# Altium PCB 917S001(ZHTH-010)-F.PcbDoc (part 1 of 2)
Units mm, origin at the board's own origin, x right, y up, seen from the top; angles counter-clockwise.
Board outline 77.5 x 39.1 mm, 2 copper layers (Top Layer, Bottom Layer), stack 0.325 mm thick; 174 components, 101 nets, 467 pads, 299 vias.
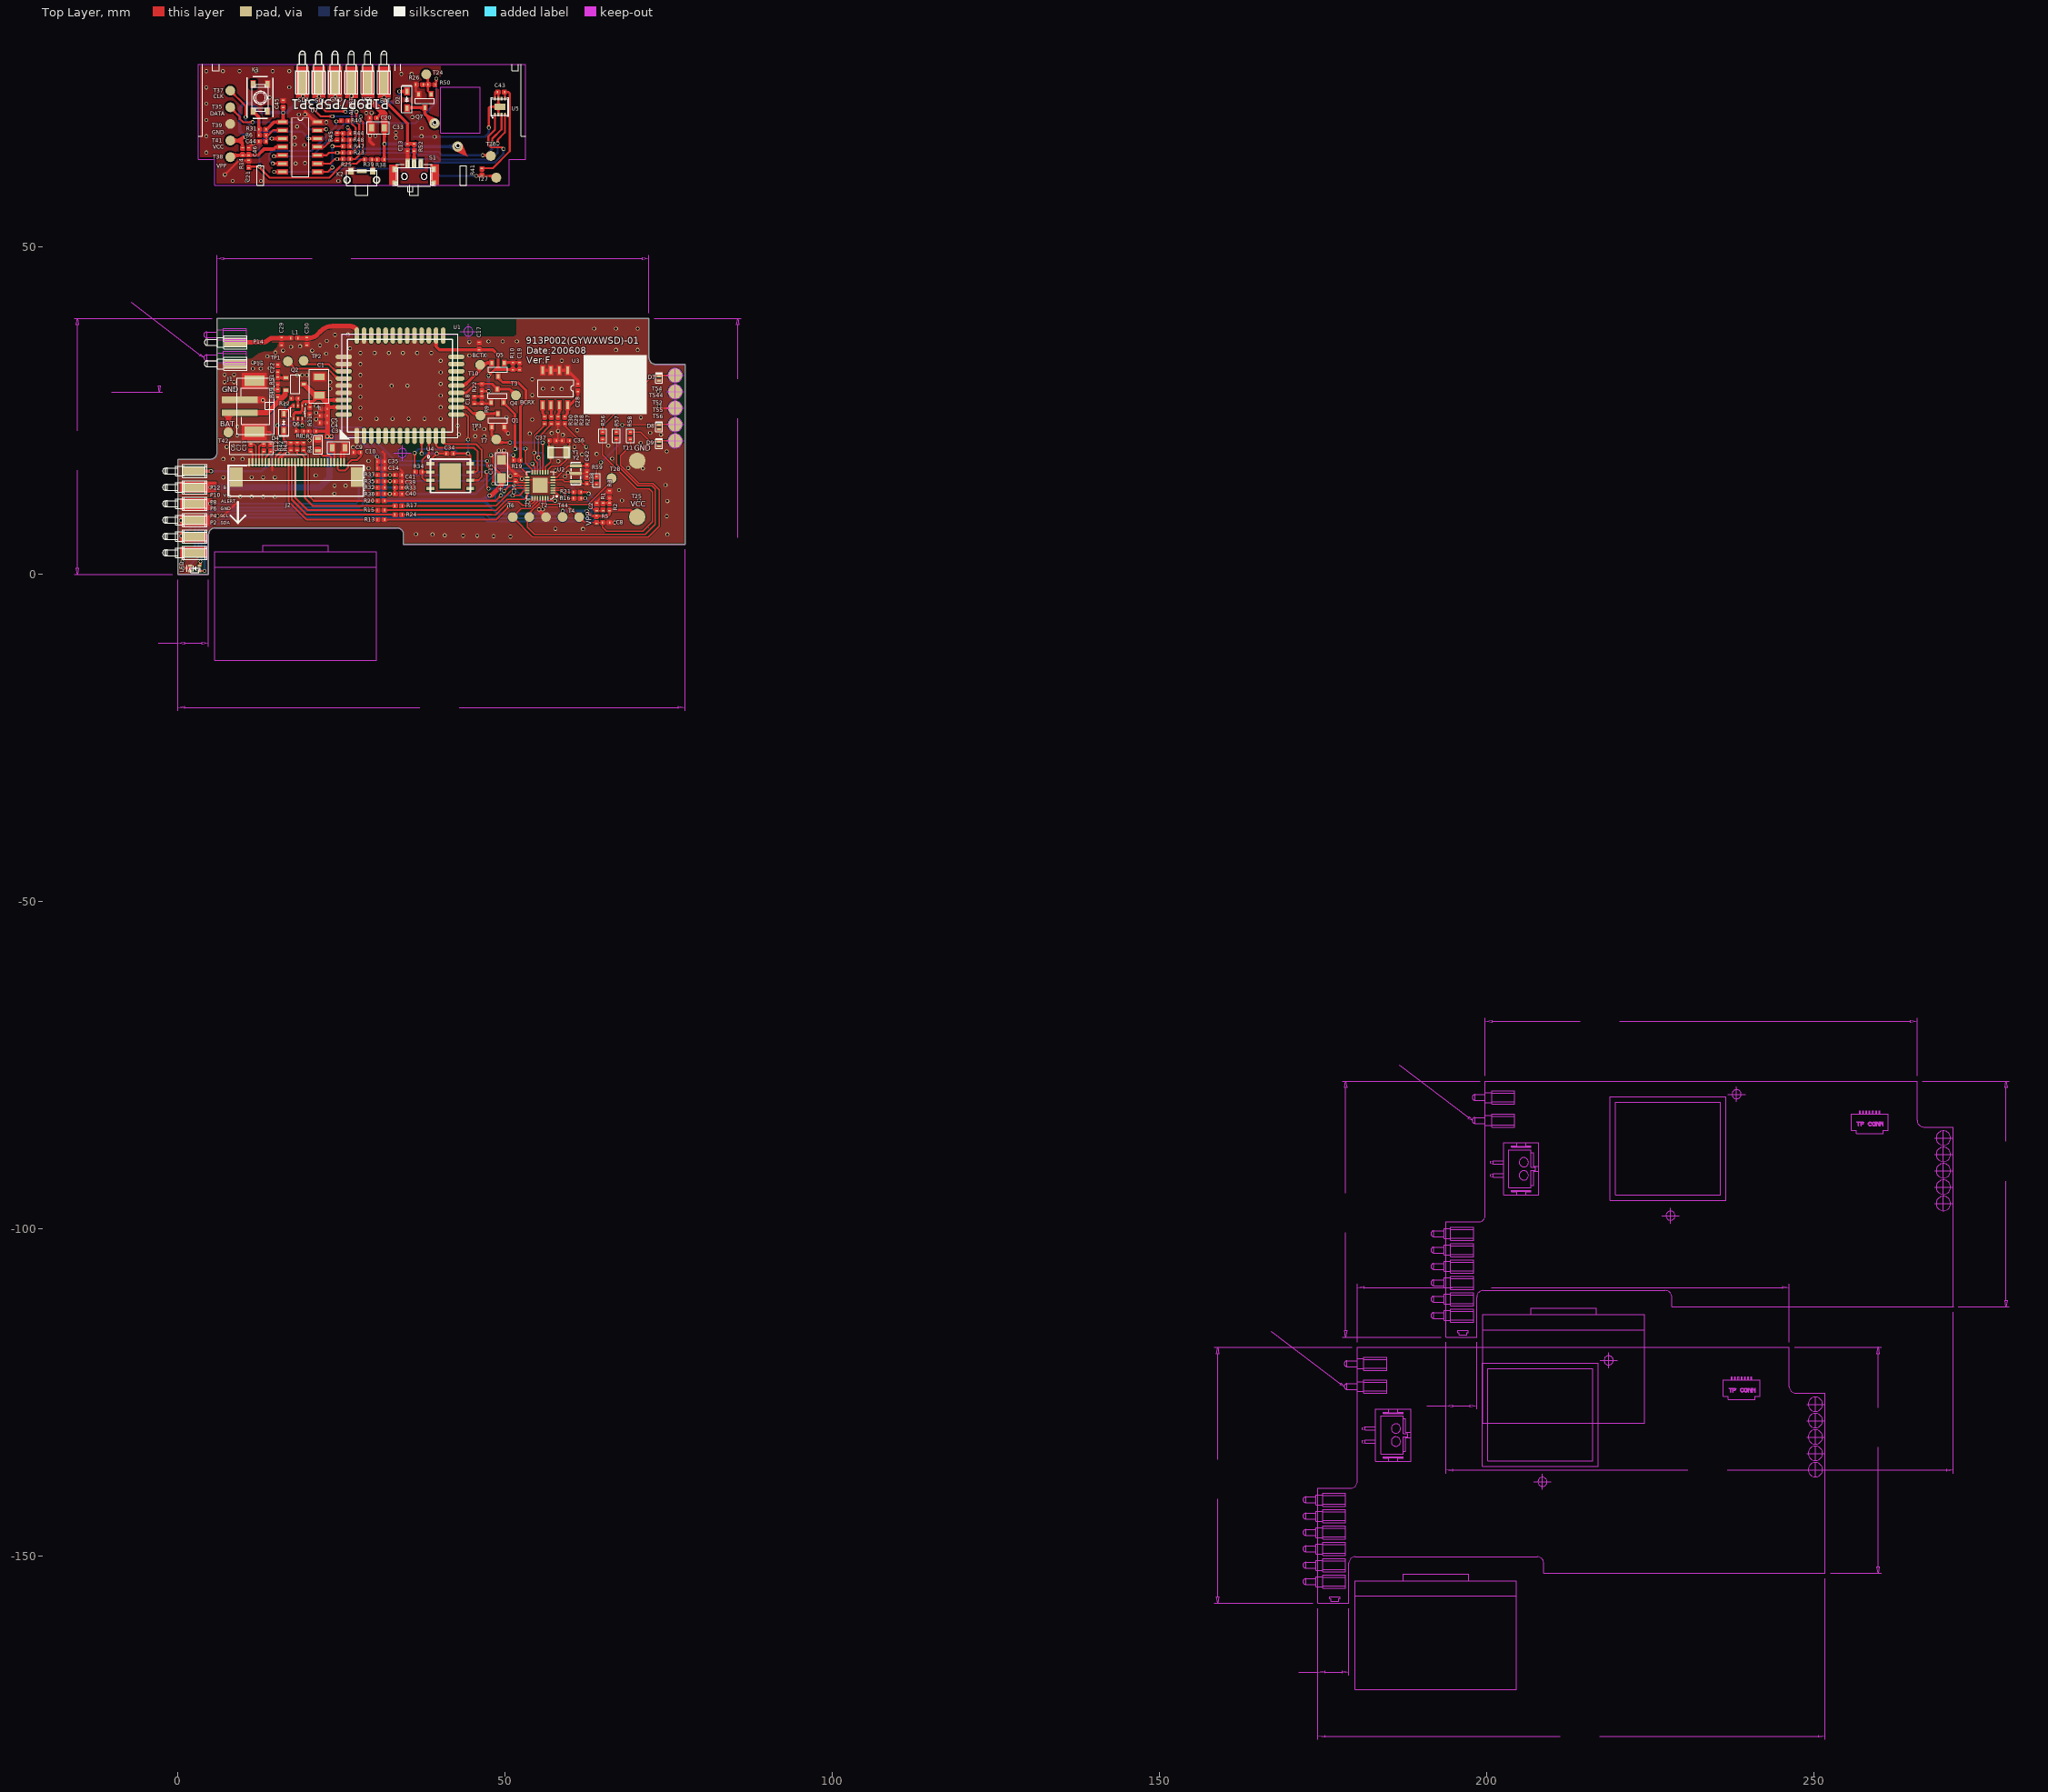
[diagram p0: Top Layer view]
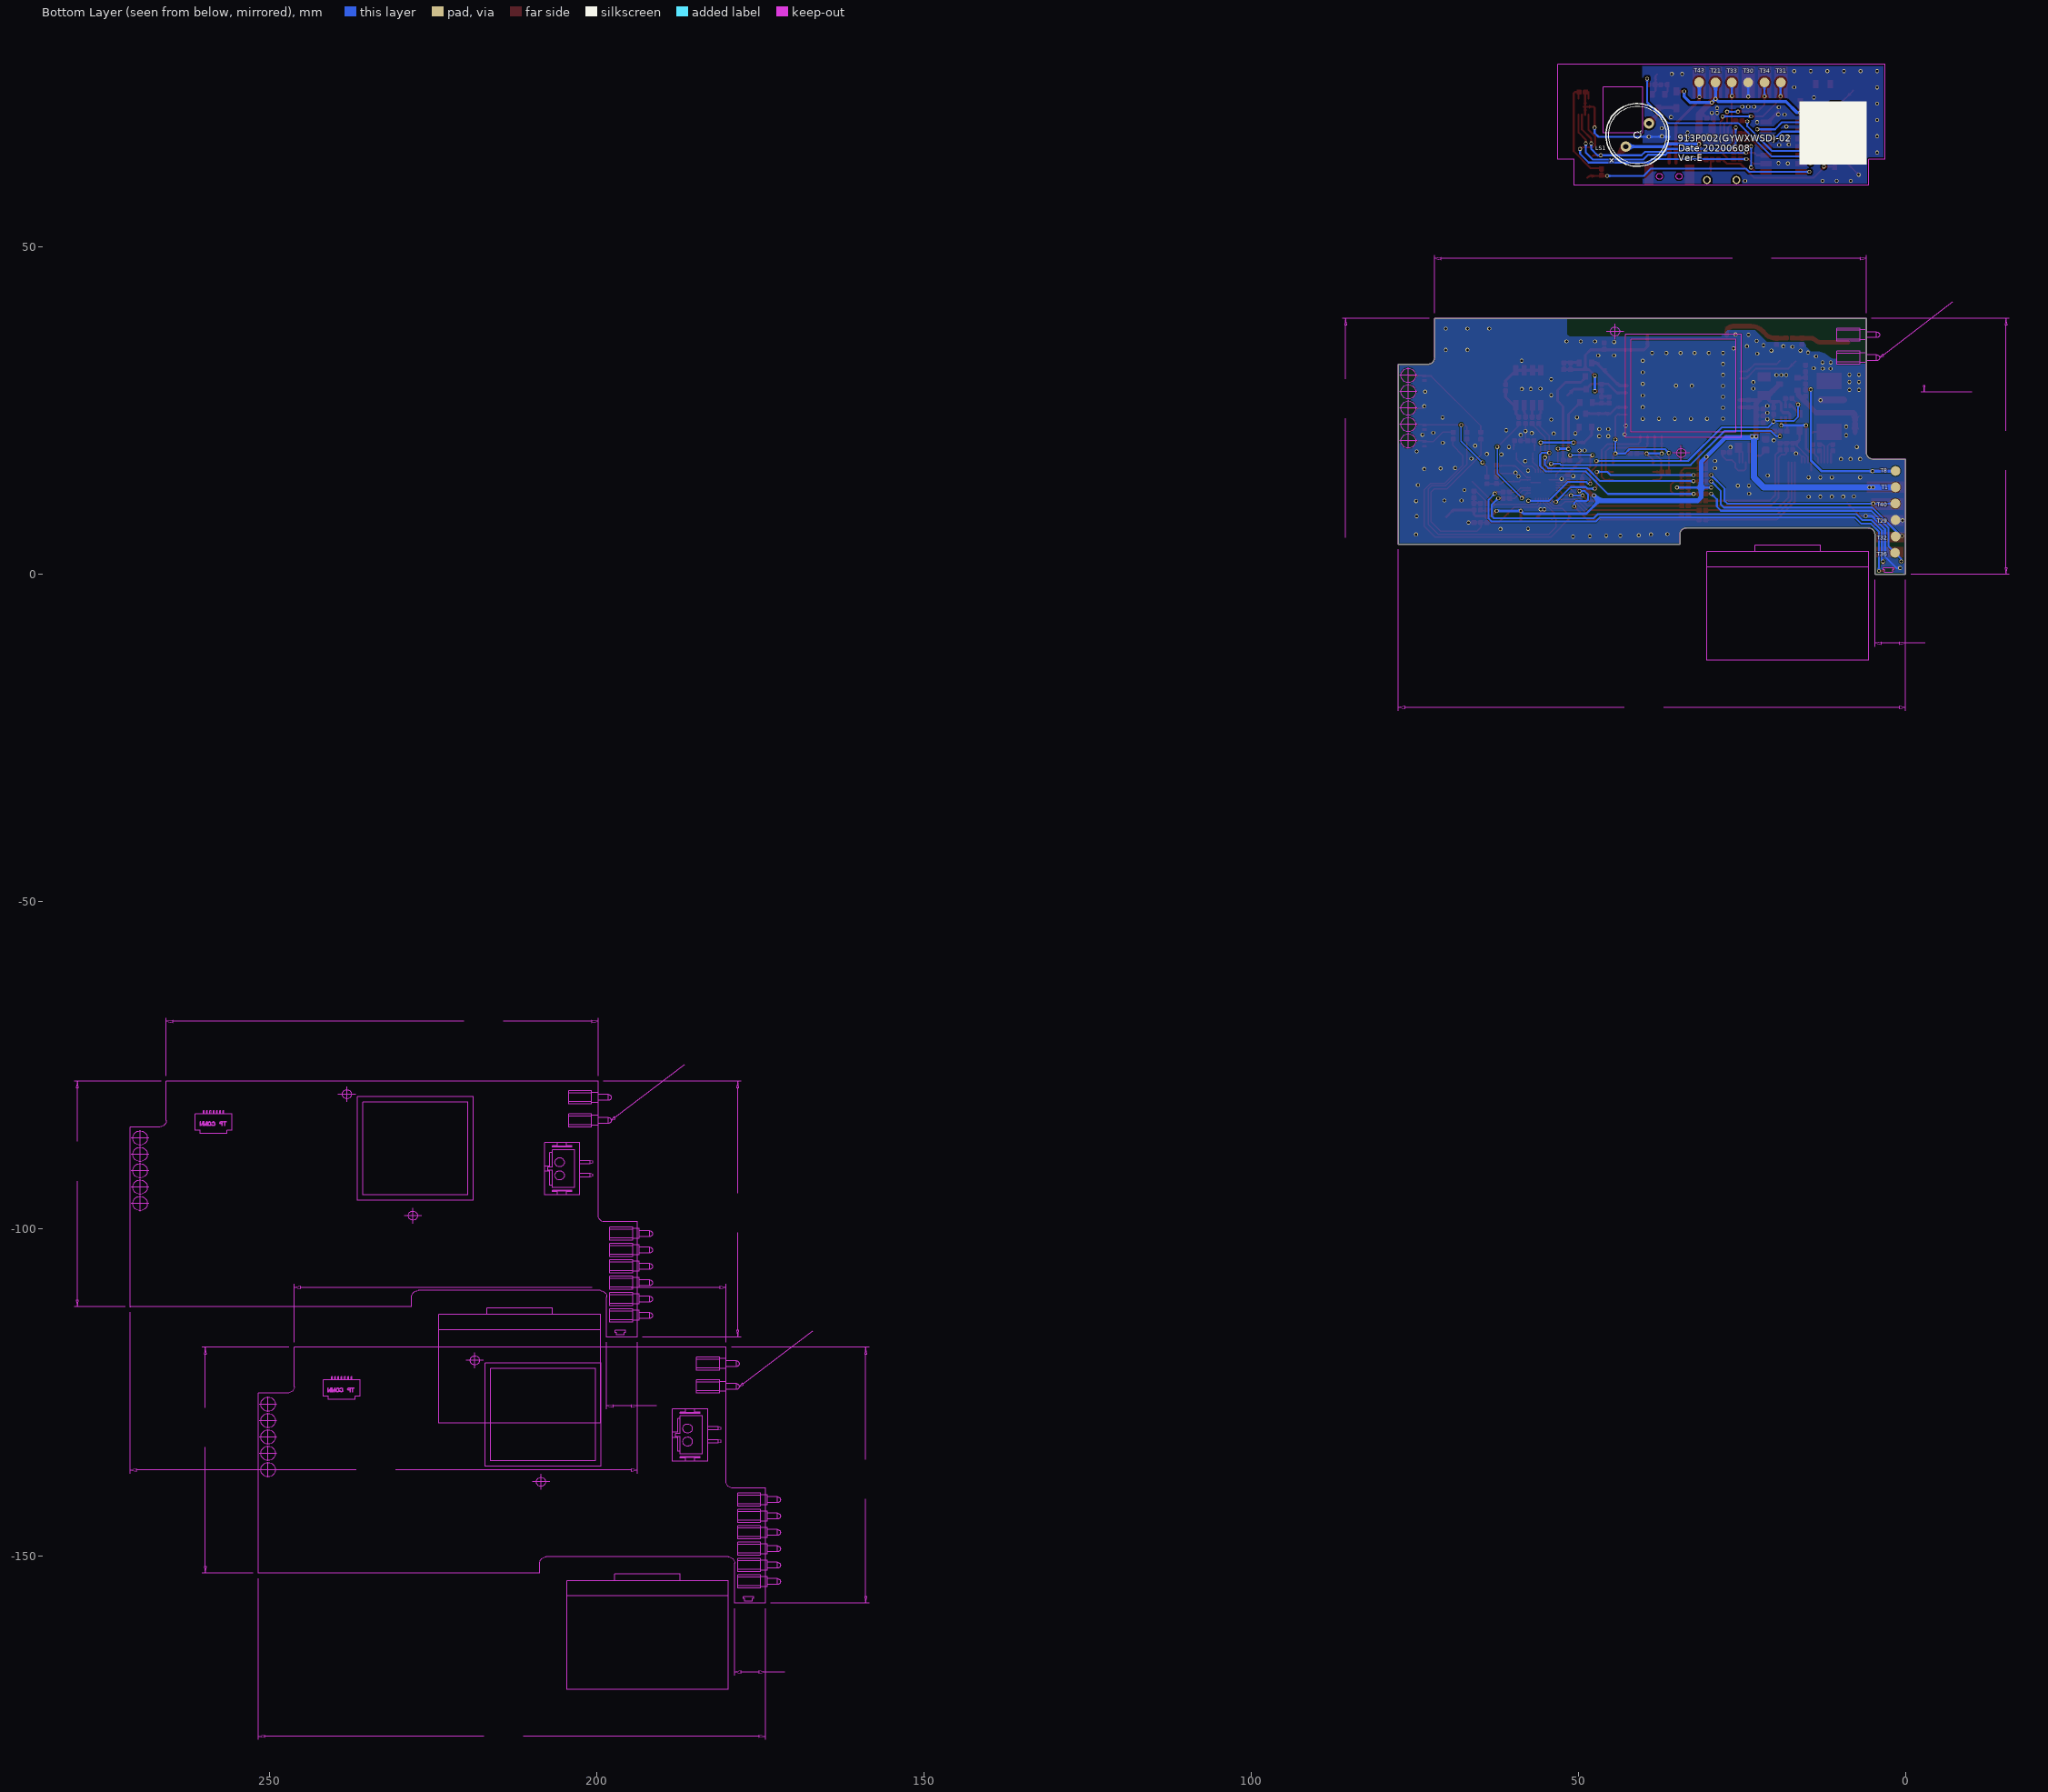
[diagram p1: Bottom Layer view, seen from below]

## Layer stack, top to bottom
Top Solder: solder mask 0.0102, Solder Resist, Dk 3.5
Top Layer: signal copper 0.0356
Dielectric 1: core 0.254, FR-4, Dk 4.2
Bottom Layer: signal copper 0.0356
Bottom Solder: solder mask 0.0102, Solder Resist, Dk 3.5

## Board outline
0,0 4.7,0 4.7,6.1 cw(c5.7,6.1) 5.7,7.1 33.5,7.1 cw(c33.5,6.1) 34.5,6.1 34.5,4.6 77.5,4.6 77.5,32.1 73,32.1 cw(c73,33.1) 72,33.1 72,39.1 6,39.1 6,18.6 cw(c5,18.6) 5,17.6 0,17.6

## Design rules (kind name [scope] priority, off if disabled: settings)
Clearance 0.3 [All] p1 off: gap=0.3
Clearance RF [(InNet('NetC29_2') AND InNet('BC_RF_ANT'))] p2: gap=0.17
Clearance 0.19 [All] p3: gap=0.15
PlaneConnect [All] p1: planeconnectstyle=Direct reliefexpansion=0.508 reliefentries=4 reliefconductorwidth=0.254 reliefairgap=0.254
PolygonConnect [All] p1: connectstyle=Direct reliefconductorwidth=0.254 reliefentries=4 polygonreliefangle="90 Angle" airgapwidth=0.254
RoutingVias [All] p1: holewidth=0.711 width=1.27 viastyle="Through Hole" minholewidth=0.711 minwidth=1.27 maxholewidth=0.711 maxwidth=1.27
SolderMaskExpansion [All] p1: expansion=0.102
Width [All] p1: maxlimit=1.5 minlimit=0.15 preferedwidth=0.3
29 further rules are at their usual default settings.

## Components (designator, comment, footprint, x,y, rotation, side; value= is the part's Value field where it differs from the comment)
C1 "100uF/6.3V" 3528 21.615,27.356 r90 top
C2 "0.1uF,0402" 0402#1 64.008,9.754 r0 top
C3 "0.1uF,0402" 0402#1 22.84,23.165 r90 top
C4 "100pF,0402" 0402#1 22.84,24.232 r90 top
C5 "22pF,0402" 0402#1 22.84,25.273 r90 top
C6 "1uF" 0402#1 11.151,18.771 r0 top
C7 "1uF" 0402#1 13.132,19.921 r180 top
C8 "0.1uF,0402" 0402#1 64.872,7.925 r270 top
C9 "4.7uF/25V" 0805 23.597,19.329 r270 top
C10 "2.2uF" 0402#1 27.965,18.644 r90 top
C11 "2.2uF,0402" 0402#1 14.199,19.921 r180 top
C12 "2.2uF,0402" 0402#1 17.272,18.974 r0 top
C13 "1uF,0402" 0402#1 35.102,64.649 r0 top
C14 "1uF,0402" 0402#1 31.623,16.205 r90 top
C15 "22uF/6.3V,3216" 3216 49.479,14.707 r270 top
C16 "0.1uF,0402" 0402#1 51.613,14.173 r0 top
C17 "2.2uF,0402" 0402#1 46.05,35.458 r180 top
C18 "1nF,±10%,50V" 0402#1 45.314,26.06 r0 top
C19 "1nF,±10%,50V" 0402#1 52.222,32.385 r180 top
C20 "0.1uF，0402" 0402#1 30.455,69.723 r90 top
C21 "100pF,0402" 0402#1 10.846,63.246 r180 top
C22 "0.1uF,0402" 0402#1 15.291,30.879 r0 top
C28 "0.1uF,0402" 0402#1 61.138,27.94 r0 top
C29 "NC" 0402#1 15.85,35.027 r0 top
C30 "NC" 0402#1 19.736,35.027 r0 top
C33 "10uF,±10%,10V" 0805 31.572,68.224 r90 top
C34 "0.1uF,0402" 0402#1 42.139,18.466 r90 top
C35 "0.1uF,0402" 0402#1 30.48,17.221 r270 top
C36 "10pF,0402" 0402#1 58.718,20.422 r270 top
C37 "10pF,0402" 0402#1 57.854,20.422 r90 top
C38 "NC" 0402#1 62.535,13.792 r0 top
C39 "33pF" 0402#1 34.29,14.199 r90 top
C40 "33pF" 0402#1 34.29,12.294 r90 top
C41 "33pF" 0402#1 34.29,15.189 r90 top
C42 "NC" 0402#1 62.535,16.764 r180 top
C43 "0.1uF，0402" 0402#1 49.987,73.685 r90 top
C44 "100pF,0402" 0402#1 12.375,66.143 r270 top
C45 "0.1uF，0402" 0402#1 16.104,71.298 r0 top
C46 "0.1uF,0402" 0402#1 10.846,64.033 r0 top
D2 "1N4148WS-7-F" SOD-323 35.001,71.222 r90 top
D4 "1SS357" SOD-323 16.205,24.536 r270 top
D7 "PESD5V0V1BL" DFN1006 73.533,29.947 r0 top
D8 "PESD5V0V1BL" DFN1006 73.533,22.479 r0 top
D9 "PESD5V0V1BL" DFN1006 73.533,19.939 r0 top
J1 "CON3" JVT1125W4T-02SN-S 9.474,25.679 r270 top
J2 "FPC-0.5-WTX-30P" "FPC-WO-0.5-30 - F" 18.186,15.986 r90 top locked
K1 "SKRPABE010" SKRPABE010 12.624,72.822 r90 top
K2 "K2-1806AN" K2-1806AN 28.118,60.249 r180 top locked
L1 "0R,0402" 0402#1 17.221,36.1 r270 top
LED "LTST-C295TGKRKT" LTST-295T 2.616,0.914 r270 top
LS1 "SH09D05YA" SH09D05YA 40.996,67.132 r135 bottom
P1 "TZ-650B01" POGOPAD 19.075,75.184 r180 top locked
P2 "TZ-650B01" POGOPAD 2.418,3.302 r270 top locked
P3 "TZ-650B01" POGOPAD 21.57,75.184 r180 top locked
P4 "TZ-650B01" POGOPAD 2.418,5.801 r270 top locked
P5 "TZ-650B01" POGOPAD 24.064,75.184 r180 top locked
P6 "TZ-650B01" POGOPAD 2.418,8.301 r270 top locked
P7 "TZ-650B01" POGOPAD 26.558,75.184 r180 top locked
P8 "TZ-650B01" POGOPAD 2.418,10.8 r270 top locked
P9 "TZ-650B01" POGOPAD 29.053,75.184 r180 top locked
P10 "TZ-650B01" POGOPAD 2.418,13.299 r270 top locked
P11 "TZ-650B01" POGOPAD 31.547,75.184 r180 top locked
P12 "TZ-650B01" POGOPAD 2.418,15.799 r270 top locked
P14 "TZ-650B01" POGOPAD 8.788,35.458 r270 top
P15 "TZ-650B01" POGOPAD 8.788,32.184 r270 top
Q1 "DTC114ECA" SOT-23(BEC) 47.981,22.504 r90 top
Q2 "AO3401A" "SOT-23 (GSD)-L" 16.51,30.023 r0 top
Q4 "MMBT3904" SOT-23(BEC) 47.879,26.238 r90 top
Q5 "MMBT3904" SOT-23(BEC) 49.886,32.309 r270 top
Q6 "BSS84DW" SOT-363 18.364,24.765 r270 top
Q7 "2N7002" SOT-23 38.71,73.355 r270 top
R1 "1K,0402,5%" 0402#1 64.973,9.754 r0 top
R2 "510K,0402,1%" 0402#1 65.964,10.904 r180 top
R3 "510K,0402,1%" 0402#1 65.964,11.633 r0 top
R4 "390K" 0603 21.387,18.872 r0 top
R5 "10K,0402" 0402#1 63.983,7.798 r0 top
R6 "1K,5%,0402" 0402#1 12.375,67.083 r270 top
R7 "1M,0402" 0402#1 19.962,21.869 r270 top
R8 "10K,0402" 0402#1 18.083,21.869 r270 top
R9 "4.7K,5%，0402" 0402#1 46.457,26.06 r0 top
R10 "4.7K,5%，0402" 0402#1 51.207,31.235 r0 top
R11 "1M,0402" 0402#1 20.193,24.384 r0 top
R12 "10K,0402" 0402#1 18.44,26.873 r90 top
R13 "22R,0402" 0402#1 30.48,8.357 r270 top
R14 "10K,0402" 0402#1 9.906,65.176 r180 top
R15 "22R,0402" 0402#1 30.479,9.804 r270 top
R16 "2K,0402" 0402#1 61.599,11.607 r90 top
R17 "22R,0402" 0402#1 33.147,10.465 r270 top
R19 "10K,5%,0402" 0402#1 51.257,17.424 r270 top
R20 "22R,0402" 0402#1 30.479,11.252 r270 top
R21 "2K,0402" 0402#1 61.599,12.573 r90 top
R22 "10K,5%,0402" 0402#1 46.457,29.134 r180 top
R23 "100R,0402" 0402#1 25.19,64.427 r270 top
R24 "22R,0402" 0402#1 33.147,9.119 r270 top
R25 "100R,0402" 0402#1 25.19,63.449 r270 top
R26 "NC" 0402#1 37.509,74.828 r90 top
R27 "100R,0603" 0402#1 59.123,22.962 r0 top
R28 "10K,0402" 0402#1 58.098,24.112 r180 top
R29 "22R,0402" 0402#1 57.074,24.112 r180 top
R30 "22R,0402" 0402#1 56.049,24.112 r180 top
R31 "100K,0402,5%" 0402#1 13.525,67.998 r90 top
R32 "4.7K,0402" 0402#1 30.479,13.269 r270 top
R33 "4.7K,0402" 0402#1 34.29,13.258 r90 top
R34 "10K,0402" 0402#1 37.363,15.646 r90 top
R35 "100R,0402" 0402#1 30.479,14.226 r270 top
R36 "100R,0402" 0402#1 30.479,12.313 r270 top
R37 "100R,0402" 0402#1 30.479,15.183 r270 top
R38 "1M,0402,5%" 0402#1 31.572,63.373 r90 top
R39 "1K,5%,0402" 0402#1 29.667,63.373 r90 top
R40 "NC" 0402#1 24.917,69.291 r270 top
R41 "0R,0402" 0402#1 46.457,62.034 r180 top
R42 "4.7K,0402" 0402#1 18.237,20.126 r180 top
R43 "4.7K,0402" 0402#1 19.202,20.117 r180 top
R44 "100R,0402" 0402#1 25.19,67.361 r270 top
R45 "100R,0402" 0402#1 24.352,66.294 r0 top
R47 "100R,0402" 0402#1 25.19,65.405 r270 top
R48 "NC" 0402#1 25.19,66.383 r270 top
R49 "1M,0402" 0402#1 15.291,28.263 r180 top
R50 "1K,0402" 0402#1 38.22,74.828 r270 top
R51 "10K,0402" 0402#1 15.291,28.996 r0 top
R52 "10K,0402" 0402#1 36.119,64.643 r0 top
R56 "10K,5%,0402" 0402#2 64.922,21.184 r0 top
R57 "10K,5%,0402(510K)" 0402#2 67.031,21.184 r0 top
R58 "10K,5%,0402" 0402#2 69.139,21.184 r0 top
R59 "NC 0R" 0402#2 63.983,14.351 r0 top
S1 "MK-12C01B" K3-1293S 36.119,60.808 r0 top locked
T1 "TestPoints" TESTPOINTS#1 1.549,13.31 r180 bottom
T2 "TestPoints" TESTPOINTS#1 56.261,8.763 r0 top
T3 "TestPoints" TESTPOINTS-1.5#1 51.664,27.356 r0 top
T4 "TestPoints" TESTPOINTS#2 59.851,8.763 r0 top
T5 "TestPoints" TESTPOINTS#1 53.721,8.763 r0 top
T6 "TestPoints" TESTPOINTS#3 51.698,8.763 r0 top
T7 "TestPoints" TESTPOINTS-1.5#1 48.666,20.625 r0 top
T8 "TestPoints" TestPoints#1 1.549,15.799 r180 bottom
T10 "TestPoints" TESTPOINTS-1.5#1 46.203,32.004 r270 top
T11 "TestPoints" TESTPOINTS-1.5#2 70.206,17.374 r0 top
T21 "TestPoints" TESTPOINTS-1.5#1 29.072,75.159 r0 bottom
T24 "TestPoints" TESTPOINTS-1.5#1 37.973,76.403 r90 top
T25 "TestPoints" TESTPOINTS-1.5#2 70.206,8.763 r90 top
T26 "TestPoints" TESTPOINTS-1.5#1 47.828,63.932 r90 top
T27 "TestPoints" TESTPOINTS-1.5#1 48.666,60.604 r90 top
T28 "TestPoints" TESTPOINTS-1.5#1 66.294,14.681 r90 top
T29 "TestPoints" TESTPOINTS-1.5#1 1.549,8.306 r90 bottom
T30 "TestPoints" TESTPOINTS-1.5#1 24.072,75.159 r270 bottom
T31 "TestPoints" TESTPOINTS-1.5#1 19.072,75.159 r0 bottom
T32 "TestPoints" TESTPOINTS-1.5#1 1.549,5.791 r90 bottom
T33 "TestPoints" TESTPOINTS-1.5#1 26.572,75.159 r270 bottom
T34 "TestPoints" TESTPOINTS-1.5#1 21.572,75.159 r270 bottom
T35 "TestPoints" TESTPOINTS-1.5#1 8.026,71.359 r90 top
T36 "TestPoints" TESTPOINTS-1.5#1 1.626,3.302 r90 bottom
T37 "TestPoints" TESTPOINTS-1.5#3 8.026,73.127 r90 top
T38 "TestPoints" TESTPOINTS-1.5#4 8.026,63.652 r90 top
T39 "TestPoints" TESTPOINTS-1.5#1 8.026,68.819 r90 top
T40 "TestPoints" TESTPOINTS-1.5#1 1.575,10.82 r90 bottom
T41 "TestPoints" TESTPOINTS-1.5#1 8.026,66.279 r0 top
T42 "TestPoints" TESTPOINTS#1 7.722,21.692 r90 top
T43 "TestPoints" TESTPOINTS-1.5#1 31.547,75.184 r270 bottom
T44 "TestPoints" TESTPOINTS-1.5#1 58.801,8.763 r90 top
T52 "TestPoints" TestPoints#2 117.856,2.946 r90 top
T54 "TestPoints" TestPoints#3 123.698,2.946 r90 top
T55 "TestPoints" TestPoints#4 129.54,2.946 r90 top
T56 "TestPoints" TestPoints#5 85.115,15.215 r90 top
T544 "TestPoints" TestPoints#6 110.49,2.946 r90 top
TP1 "TP1" TESTPOINTS-1.5#1 16.815,32.537 r270 top
TP2 "TP2" TESTPOINTS-1.5#1 19.228,32.639 r0 top
TP3 "TP2" TESTPOINTS-1.5#1 46.253,24.257 r90 top
U1 "BC28" BC28 33.96,28.829 r270 top locked
U2 "PIC18F26Q10T-I_STX" UQFN28(4X4) 55.372,13.614 r180 top
U3 "CAT24C512WI-GT3" SO8 59.563,31.166 r270 top
U4 "中国电信" SMT_CARD 38.608,16.916 r0 top
U5 "SHT31-DIS" DFN-8(2.5X2.5) 49.225,71.45 r90 top
U7 "PIC16LF1503" SO14 16.002,69.113 r0 top
Y1 "ABS07-32.768KHZ-T" XTAL3215 58.217,18.644 r0 top
Y2 "NC" Y3215 61.57,13.716 r90 top

## Footprints (in the part's own frame and the unit in brackets; to place one, negate y for a bottom-side part, rotate by r counter-clockwise, add the part's x,y. Pads: shape width x height; smd on the part's side, far side on the other; paste and mask are expansions set on the pad)
0402#1 [mm]
  rect 0.4x0.2 smd: 1(0,0) 2(0,1.15)
  Top Layer region: -0.352,0.873 0.351,0.873 0.351,1.401 -0.352,1.401
  Top Layer region: 0.352,1.402 -0.351,1.402 -0.351,0.874 -0.336,0.797 -0.292,0.732 -0.227,0.689 -0.151,0.673 -0.151,0.673 0.152,0.673 0.228,0.689 0.293,0.732 0.337,0.797 0.352,0.874 0.352,0.874
  Top Layer region: -0.352,-0.252 0.351,-0.252 0.351,0.276 0.336,0.353 0.292,0.418 0.227,0.461 0.151,0.477 0.151,0.477 -0.152,0.477 -0.228,0.461 -0.293,0.418 -0.337,0.353 -0.352,0.276 -0.352,0.276
  body extent -0.24,0.12 0.26,1.12, height 0.35
0402#2 [mm]
  rect 0.4x0.2 smd mask+0: 1(0,-0.575) 2(0,0.575)
  Top Layer region: -0.351,-0.267 -0.342,-0.241 -0.329,-0.216 -0.312,-0.194 -0.29,-0.176 -0.265,-0.163 -0.238,-0.155 -0.211,-0.152 -0.211,-0.153 0.206,-0.152 0.234,-0.155 0.262,-0.164 0.287,-0.177 0.309,-0.195 0.328,-0.217 0.341,-0.243 0.349,-0.27 0.352,-0.299 0.351,-0.299 0.351,-0.827 -0.353,-0.826 -0.353,-0.826 -0.353,-0.295
  Top Layer region: -0.353,-0.826 -0.352,-0.827 -0.352,-0.827 -0.353,-0.826
  Top Layer region: 0.351,0.267 0.342,0.241 0.329,0.216 0.312,0.194 0.29,0.176 0.265,0.163 0.238,0.155 0.211,0.152 0.211,0.153 -0.206,0.152 -0.234,0.155 -0.262,0.164 -0.287,0.177 -0.309,0.195 -0.328,0.217 -0.341,0.243 -0.349,0.27 -0.352,0.299 -0.351,0.299 -0.351,0.827 0.353,0.826 0.353,0.826 0.353,0.295
  Top Layer region: 0.353,0.826 0.352,0.827 0.352,0.827 0.353,0.826
  silkscreen extent -0.58,-1.05 0.58,1.05
0603 [mm]
  rect 0.903x0.503 smd mask+0: 1(0,0.002) 2(0,1.905)
  Top Layer region: 0.552,1.542 0.549,1.503 0.54,1.465 0.525,1.428 0.504,1.395 0.479,1.365 0.449,1.339 0.415,1.319 0.379,1.304 0.34,1.295 0.301,1.291 0.301,1.292 -0.302,1.291 -0.341,1.295 -0.379,1.304 -0.416,1.319 -0.449,1.339 -0.479,1.365 -0.505,1.395 -0.525,1.428 -0.54,1.465 -0.549,1.503 -0.553,1.542 -0.552,1.542 -0.552,2.255 -0.552,2.255 0.551,2.255
  Top Layer region: 0.552,0.364 0.549,0.403 0.54,0.442 0.525,0.478 0.504,0.512 0.479,0.542 0.449,0.567 0.415,0.588 0.379,0.603 0.34,0.612 0.301,0.615 0.301,0.614 -0.302,0.615 -0.341,0.612 -0.379,0.603 -0.416,0.588 -0.449,0.567 -0.479,0.542 -0.505,0.512 -0.525,0.478 -0.54,0.442 -0.549,0.403 -0.553,0.364 -0.552,0.364 -0.552,-0.349 -0.552,-0.349 0.551,-0.349
  silkscreen extent -0.7,-0.5 0.7,2.41, body extent -0.37,0.11 0.43,1.71, height 0.45
0805 [mm]
  rect 1.14x0.75 smd: 1(0,0) 2(0,1.954)
  Top Layer region: 0.772,2.53 -0.772,2.53 -0.772,1.427 0.772,1.427
  Top Layer region: 0.772,0.527 -0.771,0.527 -0.771,-0.577 0.772,-0.577
  silkscreen extent -0.92,-0.73 0.92,2.68, body extent -0.61,-0.01 0.64,1.99, height 0.55
3216 [mil]
  rect 60x50 smd: 1(0,0) 2(-110,0)
  silkscreen extent -154,-35 39,37, body extent -151,-35 38,36, height 73
3528 [mm]
  rect 1x1.6 smd: 1(0,0) 2(2.829,0)
  Top Layer region: -0.702,-1.001 0.702,-1.001 0.702,1.002 -0.702,1.002
  Top Layer region: 2.127,-1.001 3.531,-1.001 3.531,1.002 2.127,1.002
  silkscreen extent -1.2,-1.5 4,1.5, body extent -1.1,-1.5 3.9,1.5, height 2.16
BC28 [mm] "BC28 15.8X17.7mm H2.05mm RO"
  oval 2.5x0.7 smd paste+0 mask+0.05: 1(7.65,-6.6) 2(7.65,-5.5) 3(7.65,-4.4) 4(7.65,-3.3) 5(7.65,-2.2) 6(7.65,-1.1) 7(7.65,0) 8(7.65,1.1) 9(7.65,2.2) 10(7.65,3.3) 11(7.65,4.4) 12(7.65,5.5) 13(7.65,6.6) 23(-7.65,6.6) 24(-7.65,5.5) 25(-7.65,4.4) 26(-7.65,3.3) 27(-7.65,2.2) 28(-7.65,1.1) 29(-7.65,0) 30(-7.65,-1.1) 31(-7.65,-2.2) 32(-7.65,-3.3) 33(-7.65,-4.4) 34(-7.65,-5.5) 35(-7.65,-6.6)
  oval 0.7x2.5 smd paste+0 mask+0.05: 14(4.4,8.6) 15(3.3,8.6) 16(2.2,8.6) 17(1.1,8.6) 18(0,8.6) 19(-1.1,8.6) 20(-2.2,8.6) 21(-3.3,8.6) 22(-4.4,8.6) 36(-4.4,-8.6) 37(-3.3,-8.6) 38(-2.2,-8.6) 39(-1.1,-8.6) 40(0,-8.6) 41(1.1,-8.6) 42(2.2,-8.6) 43(3.3,-8.6) 44(4.4,-8.6)
  rect 1x1 on Top Overlay mask+0.05: 45(3.6,-2.7) 46(3.6,-0.9) 47(3.6,0.9) 48(3.6,2.7) 49(1.8,4.5) 50(0,4.5) 51(-1.8,4.5) 52(-3.6,2.7) 53(-3.6,0.9) 54(-3.6,-0.9) 55(-3.6,-2.7) 56(-1.8,-4.5) 57(0,-4.5) 58(1.8,-4.5)
  silkscreen extent -7.9,-9.2 8.2,8.85, body extent -7.9,-8.85 7.9,8.85, height 2
DFN1006 [mm]
  rect 0.65x0.35 smd mask+0: 1(0,-0.35) 2(0,0.35)
  Top Layer region: 0.35,0.55 -0.35,0.55 -0.35,0.15 0.35,0.15
  Top Layer region: 0.35,-0.15 -0.35,-0.15 -0.35,-0.55 0.35,-0.55
  silkscreen extent -0.55,-0.7 0.55,0.89
DFN-8(2.5X2.5) [mm]
  rect 0.55x0.3 smd paste-0.025 mask-0.025: 1(-1.225,0.75) 2(-1.225,0.25) 3(-1.225,-0.25) 4(-1.225,-0.75) 5(1.225,-0.75) 6(1.225,-0.25) 7(1.225,0.25) 8(1.225,0.75)
  rect 1x1.7 smd paste-0.05 mask-0.05: 8(0,0)
  silkscreen extent -1.75,-1.33 1.43,1.33, body extent -1.25,-1.25 1.25,1.25, height 1
"FPC-WO-0.5-30 - F" [mm]
  rect 1.25x0.3 smd: 1(1.11,-7.225) 2(1.11,-6.725) 3(1.11,-6.225) 4(1.11,-5.725) 5(1.11,-5.225) 6(1.11,-4.725) 7(1.11,-4.225) 8(1.11,-3.725) 9(1.11,-3.225) 10(1.11,-2.725) 11(1.11,-2.225) 12(1.11,-1.725) 13(1.11,-1.225) 14(1.11,-0.725) 15(1.11,-0.225) 16(1.11,0.275) 17(1.11,0.775) 18(1.11,1.275) 19(1.11,1.775) 20(1.11,2.275) 21(1.11,2.775) 22(1.11,3.275) 23(1.11,3.775) 24(1.11,4.275) 25(1.11,4.775) 26(1.11,5.275) 27(1.11,5.775) 28(1.11,6.275) 29(1.11,6.775) 30(1.11,7.275)
  rect 3x2 smd: 31(-1.11,-9.275) 32(-1.11,9.275)
  silkscreen extent -4.06,-10.32 0.67,10.37, body extent -4.06,-10.3 0.67,10.37, height 2.2
JVT1125W4T-02SN-S [mm]
  rect 1x5.5 smd: 1(-1,0) 2(1,0)
  rect 1.6x3 smd: 3(-3.9,2.25) 3(3.9,2.25)
  Top Layer region: -5.156,0.279 -2.642,0.279 -2.642,4.14 -5.156,4.14
  Top Layer region: 5.156,4.14 2.642,4.14 2.642,0.279 5.156,0.279
  silkscreen extent -4.3,-0.45 4.3,5.25, body extent -4.25,-0.38 4.24,5.22, height 6.7
K2-1806AN [mm]
  rect 0.8x1 smd: 1(1.675,-1.35) 2(-1.675,-1.35)
  rect 1.5x0.6 smd: 3(0,-1.35)
  round 1.2 hole 0.8: 4(-2.25,0) 5(2.25,0)
  silkscreen extent -2.35,-1.45 2.35,2.35, body extent -2.35,-1.45 2.35,2.4, height 1.9
K3-1293S [mm]
  rect 0.75x0.9 smd: 0(-2.975,-1.1) 0(-2.975,1.1) 0(2.975,-1.1) 0(2.975,1.1)
  rect 0.7x1.3 smd: 1(-1,2.05) 2(0,2.05) 3(1,2.05)
  Keep-Out Layer circle w0.01: c1.499,0 r0.45
  Keep-Out Layer circle w0.01: c-1.5,0 r0.45
  silkscreen extent -2.67,-2.34 2.69,1.85, body extent -2.61,-2.34 2.64,1.79, height 1.4
LTST-295T [mm]
  rect 0.4x0.6 smd: 1(0.4,0.7) 2(-0.4,0.7) 3(0.4,-0.7) 4(-0.4,-0.7)
  silkscreen extent -0.5,-1.3 0.5,0.2, body extent -0.47,-0.85 0.47,0.85, height 0.56
POGOPAD [mm]
  rect 1.4x3.5 smd: 1(0,0)
  silkscreen extent -0.99,-4.73 1.01,1.77
SH09D05YA [mm] "BUZZER"
  round 1.6 hole 0.8: 1(-2.5,0) 2(2.5,0)
  silkscreen extent -4.8,-4.8 4.8,4.8, body extent -4.6,-4.6 4.6,4.6, height 5.5
SKRPABE010 [mm] "3.2*4.6*2.5mm ,四脚"
  rect 1.05x0.65 smd mask+0: 1(-2.075,1.1) 2(2.075,-1.1) ""(-2.075,-1.1) ""(2.075,1.1)
  Top Layer region: -2.675,-1.5 -1.475,-1.5 -1.475,-0.7 -2.675,-0.7
  Top Layer region: -2.675,0.7 -1.475,0.7 -1.475,1.5 -2.675,1.5
  Top Layer region: 1.475,0.7 2.675,0.7 2.675,1.5 1.475,1.5
  Top Layer region: 1.475,-1.5 2.675,-1.5 2.675,-0.7 1.475,-0.7
  silkscreen extent -3.16,-1.94 3.26,2.05
SMT_CARD [mm]
  rect 3.3x3.9 smd: 0(3,-1.905)
  rect 1.2x0.5 smd: 1(0,0) 2(0,-1.27) 3(0,-2.54) 4(0,-3.81) 5(6.096,-3.81) 6(6.096,-2.54) 7(6.096,-1.27) 8(6.096,0)
  silkscreen extent -0.49,-4.41 6.1,1.24, body extent 0,-4.41 6.1,0.6, height 0.95
SO8 [mm]
  rect 1.2x0.4 smd: 1(0,0)
  rect 1.2x0.41 smd: 2(0,-1.27) 3(0,-2.54) 4(0,-3.81) 5(5.334,-3.81) 6(5.334,-2.54) 7(5.334,-1.27) 8(5.334,0)
  round 0.6 on Top Overlay: ""(-0.064,0.953)
  Top Layer region: -0.802,-0.406 0.801,-0.406 0.801,0.406 -0.802,0.406
  Top Layer region: -0.802,-1.676 0.801,-1.676 0.801,-0.864 -0.802,-0.864
  Top Layer region: -0.802,-2.946 0.801,-2.946 0.801,-2.134 -0.802,-2.134
  Top Layer region: -0.802,-4.216 0.801,-4.216 0.801,-3.404 -0.802,-3.404
  Top Layer region: 4.532,-0.406 6.135,-0.406 6.135,0.406 4.532,0.406
  Top Layer region: 4.532,-1.676 6.135,-1.676 6.135,-0.864 4.532,-0.864
  Top Layer region: 4.532,-2.946 6.135,-2.946 6.135,-2.134 4.532,-2.134
  Top Layer region: 4.532,-4.216 6.135,-4.216 6.135,-3.404 4.532,-3.404
  silkscreen extent 1.47,-4.56 4.01,0.85, body extent -0.3,-4.35 5.69,0.55, height 1.6
SO14 [mm]
  rect 1.3x0.41 smd: 1(0,0) 2(0,-1.27) 3(0,-2.54) 4(0,-3.81) 5(0,-5.08) 6(0,-6.35) 7(0,-7.62) 8(5.334,-7.62) 9(5.334,-6.35) 10(5.334,-5.08) 11(5.334,-3.81) 12(5.334,-2.54) 13(5.334,-1.27) 14(5.334,0)
  round 0.6 on Top Overlay: ""(1.947,0.03)
  Top Layer region: 4.482,-8.026 6.186,-8.026 6.186,-7.214 4.482,-7.214
  Top Layer region: 4.482,-6.756 6.186,-6.756 6.186,-5.944 4.482,-5.944
  Top Layer region: 4.482,-5.486 6.186,-5.486 6.186,-4.674 4.482,-4.674
  Top Layer region: 4.482,-4.216 6.186,-4.216 6.186,-3.404 4.482,-3.404
  Top Layer region: 4.483,-2.946 6.186,-2.946 6.186,-2.134 4.483,-2.134
  Top Layer region: 4.482,-1.676 6.186,-1.676 6.186,-0.864 4.482,-0.864
  Top Layer region: 4.482,-0.406 6.186,-0.406 6.186,0.406 4.482,0.406
  Top Layer region: -0.852,-8.026 0.852,-8.026 0.852,-7.214 -0.852,-7.214
  Top Layer region: -0.852,-6.756 0.852,-6.756 0.852,-5.944 -0.852,-5.944
  Top Layer region: -0.852,-5.486 0.852,-5.486 0.852,-4.674 -0.852,-4.674
  Top Layer region: -0.852,-4.216 0.852,-4.216 0.852,-3.404 -0.852,-3.404
  Top Layer region: -0.851,-2.946 0.852,-2.946 0.852,-2.134 -0.851,-2.134
  Top Layer region: -0.852,-1.676 0.852,-1.676 0.852,-0.864 -0.852,-0.864
  Top Layer region: -0.852,-0.406 0.852,-0.406 0.852,0.406 -0.852,0.406
  silkscreen extent 1.47,-8.36 4.01,0.65, body extent -0.4,-8.13 5.59,0.56, height 1.6
SOD-323 [mm]
  rect 0.8x0.5 smd: 1(0,0) 2(2.56,0)
  Top Layer region: -0.593,-0.452 0.601,-0.452 0.601,0.452 -0.593,0.452
  Top Layer region: 1.958,-0.452 3.162,-0.452 3.162,0.452 1.958,0.452
  silkscreen extent -0.69,-0.8 3.4,0.78, body extent -0.03,-0.68 2.57,0.67, height 1.1
SOT-23 [mm]
  rect 0.65x0.45 smd: 1(0,0) 2(0,-1.9) 3(2.057,-0.95)
  Top Layer region: 1.556,-1.352 2.559,-1.352 2.559,-0.548 1.556,-0.548
  Top Layer region: -0.502,-2.306 0.501,-2.306 0.501,-1.503 -0.502,-1.503
  Top Layer region: -0.501,-0.401 0.501,-0.401 0.501,0.401 -0.501,0.401
  silkscreen extent 0.65,-2.4 1.41,0.5, body extent -0.23,-2.44 2.27,0.56, height 1.12
"SOT-23 (GSD)-L" [mm]
  rect 0.65x0.45 smd: D(2.757,-0.95) G(0,0) S(0,-1.9)
  Top Layer region: -0.501,-0.401 0.501,-0.401 0.501,0.401 -0.501,0.401
  Top Layer region: -0.502,-2.306 0.501,-2.306 0.501,-1.503 -0.502,-1.503
  Top Layer region: 2.256,-1.351 3.259,-1.351 3.259,-0.548 2.256,-0.548
  silkscreen extent 0.71,-2.4 2.11,0.5, body extent 0.17,-2.44 2.67,0.56, height 1.05
SOT-23(BEC) [mm]
  rect 0.65x0.45 smd: B(0,0) C(2.057,-0.95) E(0,-1.9)
  Top Layer region: -0.501,-0.401 0.501,-0.401 0.501,0.401 -0.501,0.401
  Top Layer region: -0.502,-2.306 0.501,-2.306 0.501,-1.503 -0.502,-1.503
  Top Layer region: 1.555,-1.351 2.558,-1.351 2.558,-0.548 1.555,-0.548
  silkscreen extent 0.65,-2.4 1.41,0.5, body extent -0.23,-2.44 2.27,0.56, height 1.05
SOT-363 [mm]
  rect 0.4x0.15 smd: 1(-1.003,0.641) 2(-1.003,-0.009) 3(-1.003,-0.659) 4(0.997,-0.659) 5(0.997,-0.009) 6(0.997,0.641)
  Top Layer region: -1.38,-0.909 -0.63,-0.909 -0.63,-0.434 -1.38,-0.434
  Top Layer region: -1.38,-0.234 -0.63,-0.234 -0.63,0.216 -1.38,0.216
  Top Layer region: -1.378,0.416 -0.628,0.416 -0.628,0.891 -1.378,0.891
  Top Layer region: 0.62,-0.909 1.37,-0.909 1.37,-0.434 0.62,-0.434
  Top Layer region: 0.622,0.416 1.372,0.416 1.372,0.891 0.622,0.891
  Top Layer region: 0.62,-0.234 1.37,-0.234 1.37,0.216 0.62,0.216
  silkscreen extent -1.26,-1.13 0.7,1.19
TESTPOINTS#1 [mm] "TestPoints"
  round 1.5 smd: 1(0,0)
TESTPOINTS#2 [mm] "TestPoints"
  round 1.5 smd: 1(1.49,0)
TESTPOINTS#3 [mm] "TestPoints"
  round 1.5 smd: 1(-0.517,0)
TestPoints#1 [mm] "TestPoints"
  round 1.5 smd: 1(0,0)
TestPoints#2 [mm] "TestPoints"
  round 2.2 smd: 1(22.454,41.856)
TestPoints#3 [mm] "TestPoints"
  round 2.2 smd: 1(27.454,47.698)
TestPoints#4 [mm] "TestPoints"
  round 2.2 smd: 1(19.954,53.54)
TestPoints#5 [mm] "TestPoints"
  round 2.2 smd: 1(5.185,9.115)
TestPoints#6 [mm] "TestPoints"
  round 2.2 smd: 1(24.954,34.49)
TESTPOINTS-1.5#1 [mm] "TestPoints"
  round 1.5 smd: 1(0,0)
TESTPOINTS-1.5#2 [mm] "TestPoints"
  round 2.5 smd: 1(0,0)
TESTPOINTS-1.5#3 [mm] "TestPoints"
  round 1.5 smd: 1(0.773,0)
TESTPOINTS-1.5#4 [mm] "TestPoints"
  round 1.5 smd: 1(0.087,0)
UQFN28(4X4) [mm]
  rect 2.35x2.35 smd paste-0.025 mask-0.025: 0(0,0)
  rect 0.7x0.241 smd paste-0.025 mask-0.025: 1(-1.95,1.2) 2(-1.95,0.8) 3(-1.95,0.4) 4(-1.95,0) 5(-1.95,-0.4) 6(-1.95,-0.8) 7(-1.95,-1.2) 15(1.95,-1.2) 16(1.95,-0.8) 17(1.95,-0.4) 18(1.95,0) 19(1.95,0.4) 20(1.95,0.8) 21(1.95,1.2)
  rect 0.241x0.7 smd paste-0.025 mask-0.025: 8(-1.2,-1.95) 9(-0.8,-1.95) 10(-0.4,-1.95) 11(0,-1.95) 12(0.4,-1.95) 13(0.8,-1.95) 14(1.2,-1.95) 22(1.2,1.95) 23(0.8,1.95) 24(0.4,1.95) 25(0,1.95) 26(-0.4,1.95) 27(-0.8,1.95) 28(-1.2,1.95)
  silkscreen extent -2.62,-2.1 2.1,2.1, body extent -2,-2 2,2, height 0.75
XTAL3215 [mm]
  rect 1.1x1.9 smd: 1(-1.25,0) 2(1.25,0)
  silkscreen extent -1.6,-0.75 1.6,0.75, body extent -1.67,-0.82 1.67,0.82, height 1
Y3215 [mm]
  rect 0.5x1.8 smd: 1(0.457,0.725) 2(1.675,0.725) 3(2.875,0.725)
  silkscreen extent 0,0 3.35,1.45, body extent -0.1,-0.1 3.45,1.55, height 0.8

## Part data
C1 C15: library part "Cap Pol2", "Polarized Capacitor (Axial)"
C2 C3 C4 C5 C6 C7 C8 C9 C10 C11 C12 C13 C14 C16 C17 C18 C19 C20 C21 C22 C28 C29 C30 C33 C34 C35 C36 C37 C38 C39 C40 C41 C42 C43 C44 C45 C46: library part Cap, "Capacitor"
D2 D4: library part "DIODE SCHOTTKY", "Schottky Diode"
D7 D8 D9: library part "DIODE TVS", "TVS管"
J1: "Connector"
J2: library part "Header 32-2"
K1 K2: library part SW-PB, "Switch"
L1: library part Inductor, "Inductor"
LS1: library part Bell, "Electrical Bell"
P1 P2 P3 P4 P5 P6 P7 P8 P9 P10 P11 P12 P14 P15: library part POGOPIN
Q1: library part PDTC114ET, "三极管"
Q2: library part "MOS P", "MOSFET"
Q4 Q5: library part NPN, "三极管"
Q6: library part "MOS D-P(SOT363)", "MOSFET"
Q7: library part N-MOSFET
R1 R2 R3 R4 R5 R6 R7 R8 R9 R10 R11 R12 R13 R14 R15 R16 R17 R19 R20 R21 R22 R23 R24 R25 R26 R27 R28 R29 R30 R31 R32 R33 R34 R35 R36 R37 R38 R39 R40 R41 R42 R43 R44 R45 R47 R48 R49 R50 R51 R52 R56 R57 R58 R59: library part Res2, "Resistor"
S1: library part "SW SPDT", "拨动开关"
TP1 TP2 TP3: library part Component_2
U2: library part PIC16F15356
U3: library part AT24C32D
U4: library part QUAD_EUICC
U5: library part SHT35
Y1: library part XTAL, "Crystal Oscillator"
Y2: library part CSTCE12M00G52-RO

## Free pads (board coordinates)
  round 2.5 on Top Overlay: 2(43.561,76.149) 2(74.27,16.688)

## Via types
v1: diameter 0.6, hole 0.4, Top Layer to Bottom Layer, tented both sides, 299 vias

## Nets (pads, with @x,y where several pads share a name; then routed paths per layer and width w, separated by ;. In a path a pad name is that pad's centre, name@x,y a point inside that pad or via, vN(x,y) a via of type N, cw(c..) or ccw(c..) an arc to the next point about the centre after c; other vN are vias at no path point)
ALERT_IN: R40.1 U7.6 | length 16.7
  Top Layer w0.3: v1(14.529,62.763) U7.6@16.002,62.763 ; v1(24.206,69.215) 24.841,69.215 R40.1@24.917,69.291
  Bottom Layer w0.3: v1(14.529,62.763) 13.931,63.361 13.931,64.192 14.433,64.693 20.44,64.693 24.206,68.459 v1(24.206,69.215)
AT_PWR: R27.1 U2.1 | length 15.9
  Top Layer w0.2: U2.1@57.322,12.414 57.893,12.414 v1(58.649,11.659) ; R27.1@59.123,22.962 59.123,22.741 v1(62.408,19.456)
  Bottom Layer w0.2: v1(58.649,11.659) 62.408,15.418 v1(62.408,19.456)
BAT_AD: C2.1 R1.1 T28.1 U2.27 | length 15
  Top Layer w0.2: U2.27@56.172,11.664 56.172,10.96 56.43,10.702 62.729,10.702 ; R1.1@64.973,9.754 63.678,9.754 62.729,10.702 ; T28.1@66.294,14.267 62.729,10.702
BC_RESET: Q1.C TP3.1 U1.15 | length 6.8
  Top Layer w0.4: U1.15@42.56,25.529 44.169,25.529 45.136,24.561 Q1.C@48.931,24.561
BC_RF_ANT: C30.2 L1.2 U1.35 | length 10.6
  Top Layer w0.7: L1.2@18.371,36.1 20.004,36.1 ccw(c20.004,37.984) 21.336,36.652 21.862,37.178 cw(c23.658,35.382) 23.658,37.922 26.365,37.922 cw(c26.365,36.928) 27.36,36.928 U1.35@27.36,36.479
BC_RI: U1.20
BC_RXD: Q4.C R22.1 T3.1 U1.17 | length 10.4
  Top Layer w0.4: U1.17@42.56,27.729 44.112,27.729 45.491,29.108 48.016,29.108 Q4.C@48.829,28.295 50.724,28.296 T3.1@51.664,27.356
BC_TXD: Q5.E T10.1 U1.18 | length 6.9
  Top Layer w0.5: U1.18@42.56,28.829 43.764,28.829 47.244,32.309 Q5.E@47.986,32.309
BEEP_S: R50.2 U7.5 | length 34.1
  Top Layer w0.3: 39.497,74.955 v1(39.497,75.743)
  Top Layer w0.5: v1(14.681,63.881) 15.646,63.881 15.799,64.033 15.9,63.932 U7.5@16.002,64.033
  Bottom Layer w0.3: v1(14.681,63.881) 20.498,63.881 25.527,68.91 36.271,68.91 39.497,72.136 v1(39.497,75.743)
C1N: C7.2 J2.26 | length 1.8
  Top Layer w0.3: J2.26@12.911,17.096 12.911,18.55 C7.2@13.132,18.771
C1P: C7.1 J2.27 | length 3.3
  Top Layer w0.3: J2.27@12.411,17.096 12.411,19.539 12.793,19.921 C7.1@13.132,19.921
C2N: C6.2 J2.28 | length 3.3
  Top Layer w0.3: C6.2@11.252,19.921 11.626,19.921 11.911,19.635 J2.28@11.911,17.096
C2P: C6.1 J2.29 | length 1.8
  Top Layer w0.3: C6.1@11.151,18.771 11.411,18.51 J2.29@11.411,17.096
C\S\: J2.18 R13.1 | length 20.7
  Top Layer w0.3: J2.18@16.911,17.096 16.911,11.156 19.71,8.357 R13.1@30.48,8.357
D\/C\: J2.16 R15.1 | length 18.7
  Top Layer w0.3: J2.16@17.911,17.096 17.911,11.756 19.863,9.804 R15.1@30.479,9.804
GND: C1.2 C2.2 C3.2 C4.2 C5.2 C8.2 C9.2 C10.2 C11.1 C12.1 C14.1 C15.2 C16.2 C17.1 C22.2 C28.2 C29.1 C30.1 C35.2 C36.1 C37.1 C38.2 C39.1 C40.1 C41.1 C42.2 D7.1 D8.1 D9.1 J1.1 J1.3 J2.1 J2.2 J2.20 J2.21 J2.23 J2.30 J2.31 J2.32 LED.3 LED.4 P6.1 P15.1 Q1.E R3.2 R4.2 R28.2 T2.1 T11.1 T29.1 T52.1 U1.1 U1.27 U1.34 U1.36 U1.37 U1.40 U1.41 U2.0 U2.5 U2.16 U3.1 U3.2 U3.3 U3.4 Y2.2 | length 80.5
  Top Layer w0.2: 51.613,15.196 52.012,15.196 52.794,14.414 U2.16@53.422,14.414 U2.0@54.572,14.414 ; U2.0@55.772,14.014 U2.5@57.322,14.014 ; C37.1@57.854,20.422 C36.1@58.718,20.422 ; 58.098,20.421 R28.2@58.098,22.962 ; v1(59.157,14.961) 59.587,15.391 Y2.2@60.845,15.391 62.535,15.391 ; C38.2@62.535,14.942 62.535,15.391 ; C42.2@62.535,15.614 62.535,15.391 ; 62.635,15.391 62.535,15.391
  Top Layer w0.3: v1(0.838,0.965) 1.916,0.965 ; LED.3@1.916,0.514 1.916,0.965 ; LED.4@1.916,1.314 1.916,0.965 ; P6.1@3.334,8.915 v1(6.096,8.915) 6.96,8.915 8.911,10.867 ; J1.3@11.724,21.779 14.035,21.779 14.199,21.615 ; 14.411,15.859 J2.23@14.411,17.096 ; J2.21@15.411,17.096 15.411,17.772 15.684,18.045 15.911,18.045 ; J2.20@15.911,17.096 15.911,18.045 ; C12.1@17.272,18.974 v1(16.764,18.466) 16.332,18.466 15.911,18.045 ; J2.2@24.911,17.096 24.911,18.69 C9.2@25.411,19.19 ; J2.1@25.411,17.096 C9.2@25.411,19.19 ; C9.2@25.551,19.329 C9.2@25.411,19.19 ; U1.1@27.36,21.179 U1.1@27.461,21.077 ; 31.242,18.796 31.63,18.408 C35.2@31.63,17.221 C14.1@31.63,16.212 ; C14.1@31.623,16.205 33.858,16.205 34.29,15.773 C41.1@34.29,15.189 C39.1@34.29,14.199 35.382,14.199 35.916,13.665 35.916,12.802 35.408,12.294 C40.1@34.29,12.294 ; C2.2@64.008,10.904 64.008,11.049 65.742,12.783 R3.2@65.964,12.783 ; 73.838,25.4 T52.1@76,25.4
  Top Layer w0.5: C1.2@21.615,30.185 C1.2@22.19,30.185 ; C15.2@49.479,17.501 51.613,15.367 51.613,15.196 ; C15.2@49.835,17.856 v1(49.835,18.923) ; Q1.E@49.881,22.504 49.881,22.128 v1(50.47,21.539) ; v1(55.194,9.931) 55.194,9.83 T2.1@56.261,8.763 ; U3.4@55.753,31.166 U3.3@57.023,31.166 U3.2@58.293,31.166 U3.1@59.563,31.166 61.138,29.591 C28.2@61.138,29.09 ; C8.2@66.022,7.925 v1(66.802,7.925)
  Top Layer w1: J1.1@9.474,26.679 v1@12.945,26.679
  Bottom Layer w0.3: v1(0.483,8.255) T29.1@1.499,8.255 ; v1(0.838,0.965) 1.397,0.965 3.15,2.718 3.15,6.883 5.182,8.915 v1(6.096,8.915)
  other v1: 50.825,5.766 48.26,5.842 43.612,5.903 45.752,5.918 40.792,5.969 38.913,6.096 74.828,6.096 36.398,6.147 61.925,6.934 57.709,6.96 74.727,8.89 55.778,9.931 74.803,11.201 67.869,11.278 70.485,11.278 14.834,11.836 9.55,11.862 11.278,11.862 13.056,11.862 7.899,11.913 23.927,12.319 67.437,12.878 25.654,13.548 23.952,13.564 74.524,13.64 52.603,14.605 6.96,14.808 11.278,14.808 13.056,14.808 14.834,14.808 50.8,15.011 21.082,15.113 59.614,15.545 57.709,15.85 73.558,16.104 71.069,16.18 29.134,16.205 68.834,16.256 58.141,17.297 29.134,17.323 6.96,17.628 8.42,17.628 9.881,17.628 66.37,17.678 61.773,18.339 64.008,18.39 74.727,18.796 49.047,18.923 26.772,19.431 7.468,19.456 60.63,19.456 65.786,19.66 70.739,20.117 20.142,20.472 45.441,21.107 46.812,21.107 9.093,21.26 58.826,21.311 73.838,21.336 42.926,21.387 53.772,21.514 57.125,21.59 72.187,21.641 58.098,21.895 61.036,22.022 45.441,22.2 46.812,22.2 9.093,22.555 42.774,22.708 54.153,23.647 21.133,23.698 27.915,23.783 30.363,23.774 32.812,23.774 35.26,23.774 37.709,23.774 40.157,23.774 50.241,23.978 70.764,23.978 21.133,24.689 27.915,25.455 40.157,25.547 73.558,25.679 21.133,25.73 13.005,26.594 27.915,27.127 40.157,27.32 54.153,27.381 73.431,27.915 7.137,28.194 8.611,28.194 57.277,28.321 58.649,28.321 23.292,28.372 55.804,28.372 27.915,28.799 32.664,28.804 35.103,28.829 40.157,29.093 23.292,29.362 7.137,29.388 8.611,29.388 54.153,29.794 18.263,30.455 18.999,30.455 19.736,30.455 27.915,30.472 7.137,30.505 8.611,30.505 40.157,30.866 11.481,31.42 12.675,31.42 14.072,31.496 27.915,32.144 11.455,32.385 12.7,32.385 40.157,32.639 58.674,32.639 13.691,33.299 44.552,33.452 46.99,33.452 22.682,33.731 27.915,33.816 30.079,33.816 32.243,33.816 34.407,33.816 36.571,33.816 38.735,33.816 14.91,33.884 16.078,34.188 20.523,34.188 66.954,34.29 70.282,34.29 26.289,34.519 17.297,34.773 18.694,34.849 24.257,34.849 21.717,35.001 44.552,35.509 47.473,35.585 49.644,35.585 51.816,35.585 22.758,35.662 24.028,36.601 25.984,36.652 63.627,37.541 66.954,37.541 70.282,37.541
GND_S: C13.1 C20.2 C21.1 C33.2 C43.2 C44.1 C45.2 C46.2 K1.2 K2.1 P5.1 Q7.2 R26.2 S1.1 T30.1 T39.1 U5.2 U5.7 U5.8 U7.14 | length 40.3
  Top Layer w0.3: v1(7.188,61.062) 9.373,63.246 C21.1@10.846,63.246 ; C46.2@10.846,65.183 11.806,66.143 C44.1@12.375,66.143 ; R26.2@36.359,74.828 36.359,73.806 Q7.2@36.81,73.355 ; v1(47.523,68.25) 47.523,71.311 47.663,71.45 U5.8@49.225,71.45 ; U5.8@48.475,72.675 48.475,73.647 48.514,73.685 C43.2@48.837,73.685 ; U5.2@48.975,70.225 U5.8@48.975,71.2 ; U5.8@48.975,71.7 U5.7@48.975,72.675 48.975,73.547
  Top Layer w0.5: 19.489,70.663 21.038,69.113 U7.14@21.336,69.113 ; C20.2@29.305,69.723 29.305,66.266 29.861,65.71 ; S1.1@35.119,62.858 C13.1@35.119,64.632
  Bottom Layer w0.3: T30.1@24.028,75.115 24.054,75.089 v1(24.054,73) ; 36.043,66.853 46.939,66.853 47.523,67.437 v1(47.523,68.25)
  other v1: 8.382,60.122 10.541,60.122 12.7,60.122 24.536,60.122 18.009,62.789 19.431,62.84 4.369,64.44 19.329,65.608 17.856,65.659 11.525,65.862 17.856,66.726 33.325,66.726 39.243,66.853 4.369,66.929 37.236,66.929 29.362,66.98 30.201,67.005 33.325,67.513 37.262,68.174 18.212,68.402 22.708,69.088 4.369,69.418 35.839,69.875 18.491,70.256 19.456,70.282 28.804,70.485 29.616,70.51 28.804,71.247 19.38,71.349 23.165,71.425 24.054,71.425 24.968,71.425 4.369,71.907 14.021,72.847 4.369,74.397 17.043,74.422 34.163,76.454 35.738,76.454 4.369,76.886 6.904,76.886 9.439,76.886 11.974,76.886 14.508,76.886 17.043,76.886
ICSPCLK: R58.1 T6.1 U2.24 | length 47.5
  Top Layer w0.2: U2.24@54.972,11.664 54.972,11.106 53.924,10.058 52.476,10.058 T6.1@51.181,8.763 54.229,5.715 71.907,5.715 73.584,7.391 73.584,12.916 72.611,13.888 70.424,13.888 67.64,16.672 67.64,18.161 69.206,19.727 69.206,20.676 R58.1@69.139,20.609
ICSPDAT: R57.1 T5.1 U2.25 | length 42.6
  Top Layer w0.2: U2.25@55.372,11.664 55.372,10.998 53.721,9.347 T5.1@53.721,8.763 53.403,8.445 53.403,7.252 54.559,6.096 71.45,6.096 72.974,7.62 72.974,13.03 72.466,13.538 70.279,13.538 67.031,16.787 R57.1@67.031,20.609
KEY_MOV_S: C21.2 R39.2 U7.3 | length 26.7
  Top Layer w0.3: 11.056,62.306 v1(12.49,62.306) ; v1@12.497,62.179 14.072,60.604 23.139,60.604 25.273,62.738 27.33,62.738 27.965,63.373 R39.2@28.517,63.373
  Top Layer w0.5: v1(14.351,66.573) U7.3@16.002,66.573
  Bottom Layer w0.3: v1@12.497,62.306 12.497,65.964 13.106,66.573 v1(14.351,66.573)
KEY_PWR_S: C44.2 R6.2 U7.2 | length 3.6
  Top Layer w0.3: C44.2@13.525,66.143 13.525,66.789 14.58,67.843 U7.2@16.002,67.843
LED_G: R21.2 U2.3 | length 3.4
  Top Layer w0.2: U2.3@57.322,13.214 58.845,13.214 59.487,12.573 R21.2@60.449,12.573
LED_R: R16.2 U2.2 | length 3.6
  Top Layer w0.2: U2.2@57.322,12.814 58.509,12.814 59.716,11.607 R16.2@60.449,11.607
MCU_RESET: Q1.B T7.1 U2.10 | length 14.1
  Top Layer w0.2: U2.10@55.772,15.564 v1@55.772,20.142
  Top Layer w0.4: Q1.B@47.981,22.504 47.981,21.311 49.149,20.142 v1(50.749,20.142)
  Bottom Layer w0.4: v1(50.749,20.142) v1(55.778,20.142)
MCU_RXD: Q5.C R19.2 U2.15 | length 19.1
  Top Layer w0.2: R19.2@52.407,17.424 52.407,16.3 53.422,15.285 U2.15@53.422,14.814
  Top Layer w0.4: Q5.C@48.936,30.252 48.936,30.033 49.639,29.33 51.975,29.33 53.162,28.143 53.162,26.492 52.349,25.679 R19.2@52.349,17.616
MCU_SCL1: C39.2 R29.2 R32.2 R35.2 U2.11 | length 35.6
  Top Layer w0.2: U2.11@55.372,15.564 55.372,17.424 55.118,17.678 55.118,20.93 57.074,22.885 R29.2@57.074,22.962
  Top Layer w0.3: R32.2@31.629,13.269 R35.2@31.629,14.226 C39.2@33.112,14.226
  Bottom Layer w0.3: v1(32.41,14.249) 46.685,14.249 48.666,16.231 54.61,16.231 55.118,16.739 v1(55.118,17.831)
MCU_SDA1: C40.2 R30.2 R33.2 R36.2 U2.12 | length 39.2
  Top Layer w0.2: U2.12@54.972,15.564 54.972,17.037 54.458,17.551 v1(54.458,18.567) 54.458,21.209 56.049,22.801 R30.2@56.049,22.962
  Top Layer w0.3: R36.2@31.649,12.294 v1(32.394,12.294) C40.2@33.14,12.294 R33.2@33.14,13.258
  Bottom Layer w0.3: v1(32.394,12.294) 45.491,12.294 48.946,15.748 55.042,15.748 55.855,16.561 55.855,18.288 55.575,18.567 v1(54.458,18.567)
MCU_SHT_ALERT: C41.2 R37.2 U2.22 | length 27.3
  Top Layer w0.2: v1(53.442,11.074) 53.873,11.074 54.172,11.373 U2.22@54.172,11.664
  Top Layer w0.3: R37.2@31.629,15.183 v1(32.41,15.183) C41.2@33.134,15.183 ; v1(47.193,15.672) 47.193,13.386 v1(47.498,13.081)
  Bottom Layer w0.3: v1(32.41,15.183) 45.104,15.183 45.593,15.672 v1(47.193,15.672) ; v1(47.498,13.081) 48.616,13.081 48.86,13.325 51.191,13.325 v1(53.442,11.074)
MCU_TXD: Q4.E U2.14 | length 13.5
  Top Layer w0.2: v1(53.137,19.202) 53.137,16.993 54.172,15.957 U2.14@54.172,15.564
  Top Layer w0.4: Q4.E@49.779,26.238 51.537,24.481 v1(51.537,19.177)
  Bottom Layer w0.4: v1(51.537,19.177) 51.562,19.202 v1(53.137,19.202)
NB_DBG_RXD: TP2.1 U1.38 | length 6.8
  Top Layer w0.3: TP2.1@19.228,32.639 19.761,32.106 23.089,32.106 24.165,31.029 U1.38@25.36,31.029
NB_DBG_TXD: TP1.1 U1.39 | length 9.6
  Top Layer w0.3: TP1.1@16.815,32.537 17.907,31.445 22.86,31.445 24.376,29.929 U1.39@25.36,29.929
NetC9_1: C9.1 J2.4 | length 1.9
  Top Layer w0.3: J2.4@23.911,17.096 C9.1@23.911,19.015
NetC18_1: C18.1 Q4.B R9.1 | length 2.4
  Top Layer w0.4: C18.1@45.314,26.06 46.431,26.06 Q4.B@47.701,26.06
NetC19_1: C19.1 Q5.B R10.2 | length 2.3
  Top Layer w0.4: Q5.B@49.962,32.385 R10.2@51.207,32.385 C19.1@52.222,32.385
NetC22_1: C22.1 Q2.G R51.2 | length 2
  Top Layer w0.4: C22.1@15.291,30.879 R51.2@15.291,30.146 15.414,30.023 Q2.G@16.51,30.023
NetC28_1: C28.1 R27.2 U3.8 | length 4.5
  Top Layer w0.5: R27.2@59.123,24.112 59.563,24.552 U3.8@59.563,25.832 ; 59.893,25.832 61.138,27.076 C28.1@61.138,27.94
NetC29_2: C29.2 L1.1 P14.1 | length 8.6
  Top Layer w0.7: P14.1@8.788,35.458 13.013,35.458 ccw(c13.013,36.542) 13.78,35.776 cw(c14.563,34.992) 14.563,36.1 L1.1@17.221,36.1
NetC36_2: C36.2 U2.8 Y1.2 | length 6.4
  Top Layer w0.2: U2.8@56.572,15.564 56.572,15.957 57.125,16.51 58.395,16.51 59.467,17.582 Y1.2@59.467,18.644 ; Y1.2@59.868,19.045 C36.2@59.868,20.422
NetC37_2: C37.2 U2.9 Y1.1 | length 4.9
  Top Layer w0.2: U2.9@56.172,15.564 56.172,16.37 56.967,17.165 Y1.1@56.967,18.644 ; Y1.1@56.704,18.906 C37.2@56.704,20.422
NetC42_1: C42.1 U2.7 Y2.3 | length 5.8
  Top Layer w0.2: U2.7@57.322,14.814 57.893,14.814 59.669,16.591 Y2.3@60.845,16.591 62.362,16.591
NetC43_1: C43.1 R41.1 U5.5 | length 16
  Top Layer w0.3: R41.1@46.457,62.034 48.115,62.034 50.724,64.643 50.724,73.508 50.546,73.685 C43.1@49.987,73.685 U5.5@49.987,72.687
NetC46_1: C46.1 R14.2 T38.1 U7.4 | length 8.6
  Top Layer w0.5: T38.1@8.026,63.739 8.313,64.026 R14.2@9.906,64.026 12.236,64.026 13.183,64.973 14.63,64.973 14.961,65.303 U7.4@16.002,65.303
NetD2_1: D2.1 LS1.2 Q7.3 | length 5.7
  Top Layer w0.5: D2.1@35.078,71.298 Q7.3@37.76,71.298 37.76,70.368 LS1.2@39.228,68.9
NetD4_1: D4.1 Q6.3 | length 1.9
  Top Layer w0.4: D4.1@16.205,24.536 17.571,25.902
NetD7_2: D7.2 R56.2 T54.1 | length 15.2
  Top Layer w0.254: R56.2@64.922,21.759 64.922,22.708 72.511,30.297 D7.2@73.533,30.297 73.636,30.4 T54.1@76,30.4
NetD8_2: D8.2 R57.2 R59.2 T55.1 | length 19.4
  Top Layer w0.2: R59.2@63.983,14.926 63.983,16.408 v1(64.668,17.094) ; R57.2@67.031,21.759 67.031,22.479 67.381,22.829 D8.2@73.533,22.829 73.604,22.9 T55.1@76,22.9
  Bottom Layer w0.2: v1(64.668,17.094) 67.92,20.345 v1(67.92,22.809)
NetD9_2: D9.2 R58.2 T56.1 | length 7.5
  Top Layer w0.2: R58.2@69.139,21.759 70.697,21.759 72.167,20.289 D9.2@73.533,20.289 73.644,20.4 T56.1@76,20.4
NetJ2_5: J2.5 R4.1 | length 3.2
  Top Layer w0.3: R4.1@21.387,18.874 22.125,18.136 23.19,18.136 23.411,17.914 J2.5@23.411,17.096
NetK1_1: K1.1 R6.1 R31.2 | length 4
  Top Layer w0.5: K1.1@11.524,70.747 12.375,69.895 R31.2@12.375,67.998 R6.1@12.375,67.083
NetK2_2: K2.2 R38.2 R39.1 | length 2.4
  Top Layer w0.3: R39.1@29.667,63.373 R38.2@30.422,63.373 ; K2.2@29.793,61.599 29.793,63.247
NetLED_1: LED.1 R21.1 | length 73.2
  Top Layer w0.3: LED.1@3.316,0.514 3.335,0.533 v1(4.089,0.533) ; R21.1@61.599,12.573 62.561,12.573 v1(62.789,12.344)
  Bottom Layer w0.3: v1(4.089,0.533) 4.089,6.526 5.285,7.722 6.782,7.722 7.747,8.687 46.736,8.687 47.32,8.103 63.297,8.103 63.729,8.534 63.729,11.405 v1(62.789,12.344)
NetLED_2: LED.2 R16.1 | length 70.3
  Top Layer w0.3: LED.2@3.316,1.314 3.454,1.453 v1(3.454,1.956) ; R16.1@61.599,11.607 v1@62.23,11.607
  Bottom Layer w0.3: v1(3.454,1.956) 3.632,2.134 3.632,6.706 5.215,8.288 6.612,8.288 7.518,9.195 47.049,9.195 47.658,8.585 62.916,8.585 63.221,8.89 63.221,10.668 v1(62.255,11.633)
NetQ6_2: Q6.2 R12.1 | length 1
  Top Layer w0.3: Q6.2@18.355,25.768 R12.1@18.355,26.788
NetQ6_5: Q6.5 R8.1 | length 2
  Top Layer w0.3: R8.1@18.083,21.869 18.083,22.807 18.355,23.08 Q6.5@18.355,23.768
NetQ7_1: Q7.1 R26.1 R50.1 T24.1 | length 4.1
  Top Layer w0.3: R26.1@37.509,74.828 R50.1@38.22,74.828 ; T24.1@37.973,76.403 38.22,76.156 R50.1@38.22,74.828 ; Q7.1@38.71,73.355 38.22,73.845 R50.1@38.22,74.828
NetR1_2: R1.2 R2.1 R3.1 | length 1.7
  Top Layer w0.4: R1.2@64.973,10.904 R2.1@65.964,10.904 R3.1@65.964,11.633
NetR28_1: R28.1 U3.7 | length 1.8
  Top Layer w0.4: R28.1@58.098,24.112 58.098,24.519 58.293,24.714 U3.7@58.293,25.832
NetR29_1: R29.1 U3.6 | length 1.7
  Top Layer w0.4: U3.6@57.023,25.832 57.074,25.781 R29.1@57.074,24.112
NetR30_1: R30.1 U3.5 | length 1.8
  Top Layer w0.4: U3.5@55.753,25.832 55.753,24.638 56.049,24.342 R30.1@56.049,24.112
NetR44_1: R44.1 R45.2 R48.1 | length 1.7
  Top Layer w0.3: R45.2@24.352,67.444 R44.1@25.107,67.444 ; R48.1@25.19,66.383 R44.1@25.19,67.361
NetR44_2: R44.2 T26.1 U5.3 | length 33.8
  Top Layer w0.3: v1(25.959,68.275) 26.34,67.894 R44.2@26.34,67.361 ; v1(46.584,64.033) 47.583,64.033 cw(c47.583,63.687) T26.1@47.828,63.932 ; v1(48.057,65.837) 48.057,66.573 49.475,67.992 U5.3@49.475,70.225
  Bottom Layer w0.3: v1(25.959,68.275) 25.959,65.862 26.822,64.999 36.434,64.999 36.871,64.561 39.833,64.561 40.361,64.033 v1(46.584,64.033) 47.092,64.033 48.057,64.999 v1(48.057,65.837)
NetR45_1: R45.1 U7.11 | length 3.4
  Top Layer w0.3: U7.11@21.336,65.303 22.403,65.303 23.393,66.294 R45.1@24.352,66.294
NetR47_1: R47.1 U7.8 | length 7.4
  Top Layer w0.3: U7.8@21.336,61.493 22.962,61.493 v1(23.622,62.154) ; v1(23.622,65.405) R47.1@25.19,65.405
  Bottom Layer w0.3: v1(23.622,62.154) v1(23.622,65.405)
NetR52_1: R52.1 S1.2 | length 1.8
  Top Layer w0.5: S1.2@36.119,62.858 R52.1@36.119,64.643
NetT35_1: T35.1 U7.13 | length 17.6
  Top Layer w0.3: T35.1@8.026,71.359 9.474,69.912 9.474,69.596 9.982,69.088 v1(11.455,69.088) ; U7.13@21.336,67.843 21.488,67.996 v1(22.682,67.996)
  Bottom Layer w0.3: v1(11.455,69.088) 18.872,69.088 19.964,67.996 v1(22.682,67.996)
NetT37_1: T37.1 U7.12 | length 17.7
  Top Layer w0.3: T37.1@8.026,73.899 10.363,71.563 v1(10.363,69.825) ; v1(20.015,66.573) U7.12@21.336,66.573
  Bottom Layer w0.3: v1(10.363,69.825) 10.363,69.332 12.055,67.64 18.948,67.64 v1(20.015,66.573)
OLED_CS: R13.2 U2.18 | length 29
  Top Layer w0.2: v1(49.86,12.725) 50.749,13.614 U2.18@53.422,13.614
  Top Layer w0.3: R13.2@31.63,8.357 48.616,8.357 v1(50.648,10.389)
  Bottom Layer w0.3: v1(49.86,12.725) 49.047,12.725 48.539,12.217 48.539,11.43 48.793,11.176 50.394,11.176 50.648,10.922 v1(50.648,10.389)
OLED_D0_SCK_CLK: R17.2 U2.19 | length 20.3
  Top Layer w0.2: 47.549,10.465 48.616,10.465 51.365,13.214 U2.19@53.422,13.214
  Top Layer w0.3: R17.2@34.297,10.465 47.549,10.465
OLED_D1_SDI_SDA: R20.2 U2.20 | length 22.4
  Top Layer w0.2: v1(51.13,12.065) 52.222,12.065 52.972,12.814 U2.20@53.422,12.814
  Top Layer w0.3: R20.2@31.629,11.252 48.565,11.252 v1(49.378,12.065)
  Bottom Layer w0.3: v1(49.378,12.065) v1(51.13,12.065)
OLED_D/C: R15.2 U2.21 | length 23.1
  Top Layer w0.2: 47.6,9.804 48.616,9.804 50.292,11.481 52.934,11.481 53.422,11.969 U2.21@53.422,12.414
  Top Layer w0.3: R15.2@31.629,9.804 47.6,9.804
OLED_PWR: R11.1 R12.2 U2.28 | length 53.9
  Top Layer w0.2: U2.28@56.572,11.664 56.572,11.297 56.617,11.252 v1(57.658,11.252)
  Top Layer w0.3: v1(16.434,25.959) 17.29,26.815 R12.2@17.29,26.873 ; v1(20.193,23.343) R11.1@20.193,24.384 ; v1(47.269,17.323) 47.269,16.535 48.184,15.621 v1(48.184,13.868)
  Bottom Layer w0.3: v1(16.434,25.959) 16.434,24.079 17.094,23.419 20.066,23.419 21.006,22.479 28.092,22.479 33.249,17.323 v1(47.269,17.323) ; v1(48.184,13.868) 48.565,13.868 48.819,14.122 51.638,14.122 54.508,11.252 v1(57.658,11.252)
OLED_RES: R24.2 U2.23 | length 22.1
  Top Layer w0.2: 47.498,9.119 48.565,9.119 50.577,11.131 52.064,11.131 52.671,10.524 53.856,10.524 54.543,11.211 54.543,11.24 54.572,11.24 U2.23@54.572,11.664
  Top Layer w0.3: R24.2@34.297,9.119 47.498,9.119
OLED_VBAT: C11.2 J2.25 Q6.6 | length 11.5
  Top Layer w0.3: J2.25@13.411,17.096 13.411,17.882 14.199,18.669 C11.2@14.199,18.771 ; v1@19.005,22.778 Q6.6@19.005,23.768
  Top Layer w0.4: C11.2@14.199,18.771 14.781,18.771 15.24,19.229 v1(15.24,22.758)
  Bottom Layer w0.4: v1(15.24,22.758) v1(19.025,22.758)